# Altium PCB stm32g474_lof_of_via.pcbdoc
Units mil, origin at the board's own origin, x right, y up, seen from the top; angles counter-clockwise.
Board outline not stored, 2 copper layers (Top Layer, Bottom Layer); 8 components, 0 nets, 68 pads, 52 vias.
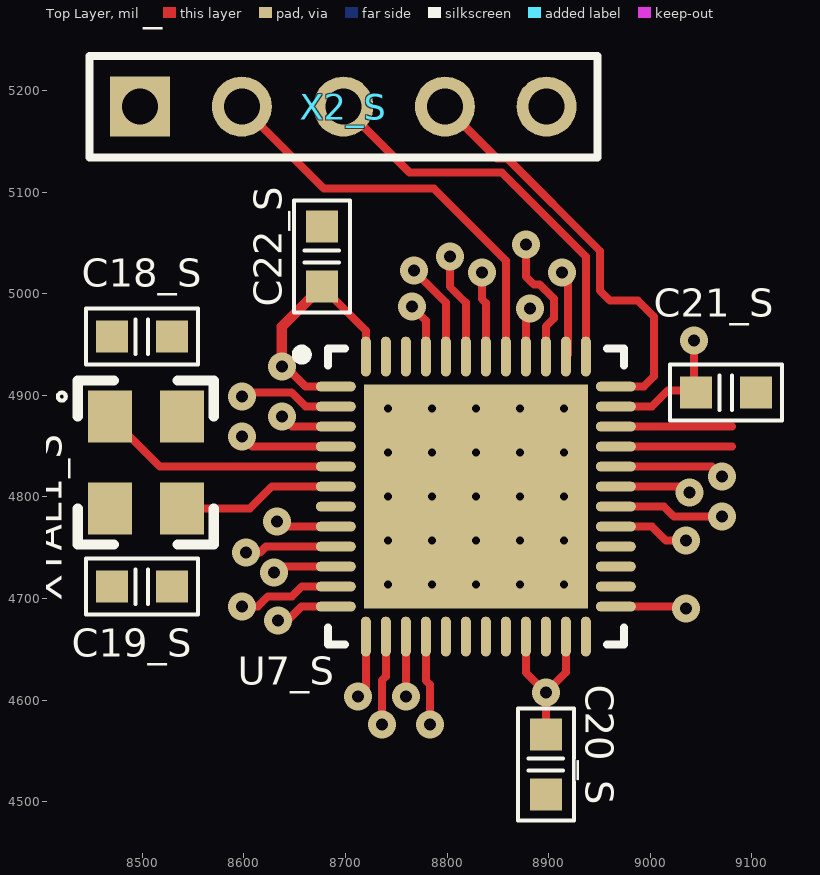
[diagram p0: Top Layer view]
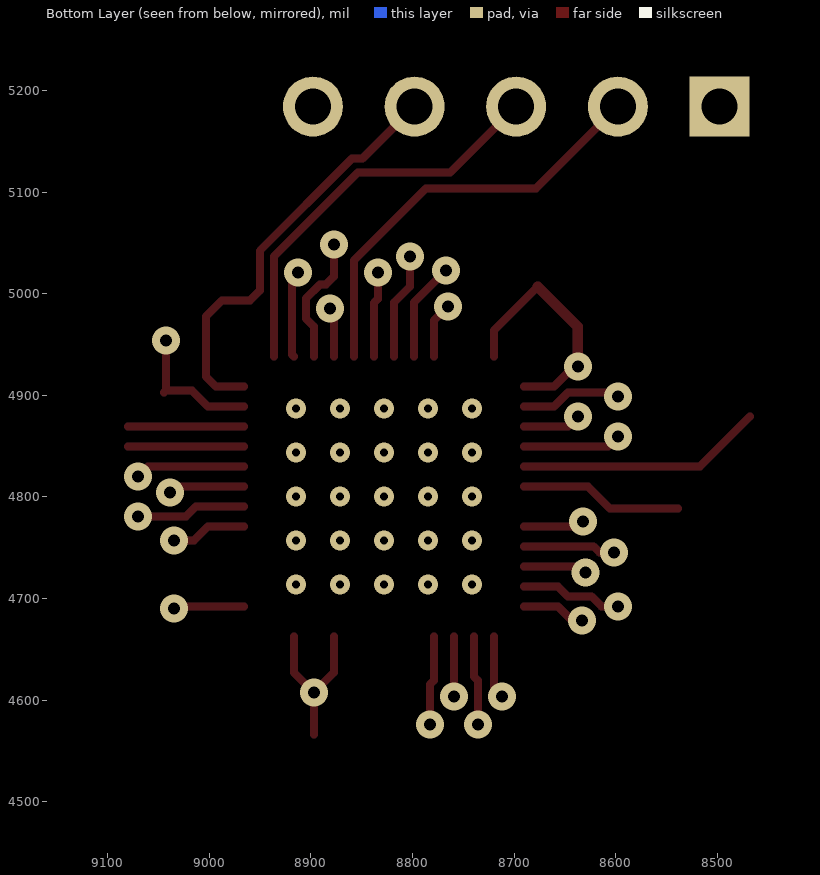
[diagram p1: Bottom Layer view, seen from below]

## Layer stack, top to bottom
Top Solder: solder mask 0.4, Solder Resist, Dk 3.5
Top Layer: signal copper 1.4
Dielectric 1: dielectric 12.6, FR-4, Dk 4.8
Bottom Layer: signal copper 1.4
Bottom Solder: solder mask 0.4, Solder Resist, Dk 3.5

## Components (designator, comment, footprint, x,y, rotation, side; value= is the part's Value field where it differs from the comment)
C18_S "12pF 16V" C_0603 8499.57,4957.76 r0 top (schematic designator C18)
C19_S "12pF 16V" C_0603 8499.57,4711.69 r180 top (schematic designator C19)
C20_S "100nF 16V" C_0603 8897.2,4536.5 r90 top (schematic designator C20)
C21_S "100nF 16V" C_0603 9074.37,4902.64 r180 top (schematic designator C21)
C22_S "100nF 16V" C_0603 8676.73,5036.5 r270 top (schematic designator C22)
U7_S "STM32G474CEU6" STM-UFQFPN48_M 8828.31,4800.28 r0 top (schematic designator U7)
X2_S "PLS-5" PLS-5-3D 8497.99,5184.13 r0 top (schematic designator X2)
XTAL1_S "KX-7 24 MHz" "KX - 7" 8538.94,4879.02 r270 top (schematic designator XTAL1)

## Footprints (in the part's own frame and the unit in brackets; to place one, negate y for a bottom-side part, rotate by r counter-clockwise, add the part's x,y. Pads: shape width x height; smd on the part's side, far side on the other; paste and mask are expansions set on the pad)
C_0603 [mm] "Chip Capacitor; Body 1.6 x 0.8 mm (LxW typ)"
  rect 0.8x0.8 smd: 1(-0.75,0) 2(0.75,0)
  silkscreen extent -1.4,-0.7 1.4,0.7, body extent -0.8,-0.4 0.8,0.4, height 0.3
"KX - 7" [mm] "Quartz"
  rect 1.3x1.1 smd: 1(0,-1.8) 2(2.3,-1.8) 3(2.3,0) 4(0,0)
  silkscreen extent -0.9,-3.1 3.2,0.8, body extent -0.46,-2.15 2.76,0.35, height 0.81
PLS-5-3D [mm] "Connector; Header; 5 Position"
  rect 1.5x1.5 hole 0.9: 1(0,0)
  round 1.5 hole 0.9: 2(2.54,0) 3(5.08,0) 4(7.62,0) 5(10.16,0)
  silkscreen extent -1.27,-1.27 11.43,1.27, body extent -1.27,-1.27 11.43,1.27, height 8.44
STM-UFQFPN48_M [mm] "QFN, 48-Leads, Body 7.1x7.1mm, Pitch 0.5mm, Thermal Pad 5.6x5.6mm, IPC Low Density"
  oval 1x0.25 smd mask+0.07: 1(-3.5,2.75) 2(-3.5,2.25) 3(-3.5,1.75) 4(-3.5,1.25) 5(-3.5,0.75) 6(-3.5,0.25) 7(-3.5,-0.25) 8(-3.5,-0.75) 9(-3.5,-1.25) 10(-3.5,-1.75) 11(-3.5,-2.25) 12(-3.5,-2.75) 25(3.5,-2.75) 26(3.5,-2.25) 27(3.5,-1.75) 28(3.5,-1.25) 29(3.5,-0.75) 30(3.5,-0.25) 31(3.5,0.25) 32(3.5,0.75) 33(3.5,1.25) 34(3.5,1.75) 35(3.5,2.25) 36(3.5,2.75)
  oval 0.25x1 smd mask+0.07: 13(-2.75,-3.5) 14(-2.25,-3.5) 15(-1.75,-3.5) 16(-1.25,-3.5) 17(-0.75,-3.5) 18(-0.25,-3.5) 19(0.25,-3.5) 20(0.75,-3.5) 21(1.25,-3.5) 22(1.75,-3.5) 23(2.25,-3.5) 24(2.75,-3.5) 37(2.75,3.5) 38(2.25,3.5) 39(1.75,3.5) 40(1.25,3.5) 41(0.75,3.5) 42(0.25,3.5) 43(-0.25,3.5) 44(-0.75,3.5) 45(-1.25,3.5) 46(-1.75,3.5) 47(-2.25,3.5) 48(-2.75,3.5)
  rect 5.6x5.6 smd mask+0.07: 49(0,0)
  silkscreen extent -4.47,-3.7 3.7,3.7, body extent -3.51,-3.52 3.51,3.5, height 0.78

## Part data
C18_S C19_S C20_S C21_S C22_S: library part C0603, "Capacitor"
U7_S: "MCU"
X2_S: library part PLS2-5, "Header, 5-Pin", LatestRevisionDate=17-Jul-2002, LatestRevisionNote="Re-released for DXP Platform.", Publisher="Altium Limited"
XTAL1_S: library part KX-7, "Quartz"

## Via types
v1: diameter 27.56, hole 11.81, Top Layer to Bottom Layer, tented both sides, 27 vias
v2: diameter 19.68, hole 7.87, Top Layer to Bottom Layer, 25 vias

## Nets (pads, with @x,y where several pads share a name; then routed paths per layer and width w, separated by ;. In a path a pad name is that pad's centre, name@x,y a point inside that pad or via, vN(x,y) a via of type N, cw(c..) or ccw(c..) an arc to the next point about the centre after c; other vN are vias at no path point)
pads on no net: C18_S.1 C18_S.2 C19_S.1 C19_S.2 C20_S.1 C20_S.2 C21_S.1 C21_S.2 C22_S.1 C22_S.2 U7_S.1 U7_S.2 U7_S.3 U7_S.4 U7_S.5 U7_S.6 U7_S.7 U7_S.8 U7_S.9 U7_S.10 U7_S.11 U7_S.12 U7_S.13 U7_S.14 U7_S.15 U7_S.16 U7_S.17 U7_S.18 U7_S.19 U7_S.20 U7_S.21 U7_S.22 U7_S.23 U7_S.24 U7_S.25 U7_S.26 U7_S.27 U7_S.28 U7_S.29 U7_S.30 U7_S.31 U7_S.32 U7_S.33 U7_S.34 U7_S.35 U7_S.36 U7_S.37 U7_S.38 U7_S.39 U7_S.40 U7_S.41 U7_S.42 U7_S.43 U7_S.44 U7_S.45 U7_S.46 U7_S.47 U7_S.48 U7_S.49 X2_S.1 X2_S.2 X2_S.3 X2_S.4 X2_S.5 XTAL1_S.1 XTAL1_S.2 XTAL1_S.3 XTAL1_S.4
copper on no net: | length 4395.7
  Top Layer w7.87: 8468.07,4879.02 8517.28,4829.8 8690.51,4829.8 ; 8538.94,4788.46 8605.87,4788.46 8627.52,4810.12 8690.51,4810.12 ; v1(8597.99,4692.01) 8613.79,4692.01 8623.63,4701.85 8647.2,4701.85 8657.05,4711.69 8690.51,4711.69 ; v1(8597.99,4859.33) 8607.83,4849.49 8690.51,4849.49 ; v1(8597.99,4898.7) 8601.93,4902.64 8647.15,4902.64 8660.93,4888.86 8690.51,4888.86 ; 8597.99,5184.13 8678.7,5103.42 8786.97,5103.42 8857.83,5032.56 8857.83,4938.07 ; v1@8607.83,4751.06 v1(8601.93,4745.16) 8615.76,4745.16 8621.67,4751.06 8690.51,4751.06 ; v1(8629.57,4725.47) 8629.57,4723.59 8627.52,4721.53 8637.36,4731.38 8690.51,4731.38 ; v1(8632.44,4775.67) 8637.36,4770.75 8690.51,4770.75 ; v1(8633.42,4678.23) 8643.07,4678.23 8656.85,4692.01 8690.51,4692.01 ; v1(8637.36,4879.02) 8647.2,4869.17 8690.51,4869.17 ; v1(8637.36,4928.23) 8641.04,4928.23 8660.73,4908.54 8690.51,4908.54 ; 8676.73,5006.97 8720.04,4963.66 8720.04,4938.07 ; 8697.99,5184.13 8762.95,5119.17 8853.9,5119.17 8936.57,5036.5 8936.57,4938.07 ; v1(8712.16,4603.43) 8720.04,4611.31 8720.04,4662.48 ; v1(8735.79,4575.87) 8735.79,4619.17 8739.72,4623.11 8739.72,4662.48 ; v1(8759.41,4603.42) 8759.41,4662.48 ; v1(8765.31,4987.28) 8779.09,4973.5 8779.09,4938.07 ; v1(8767.28,5022.78) 8798.78,4991.28 8798.78,4938.07 ; 8779.09,4662.48 8779.09,4619.17 8783.03,4615.24 v1(8783.03,4575.87) ; 8797.99,5184.13 8849.17,5132.95 8859.6,5132.95 8950.35,5042.2 8950.35,5003.03 8960.2,4993.19 8987.76,4993.19 9003.5,4977.44 9003.5,4918.39 8993.66,4908.54 8966.1,4908.54 ; v1(8802.71,5036.5) 8802.71,5006.84 8818.46,4991.08 8818.46,4938.07 ; v1(8834.21,5020.75) 8834.21,4994.82 8838.15,4990.89 8838.15,4938.07 ; 8877.52,4662.48 8877.52,4627.05 v1(8897.2,4607.36) ; 8877.52,4938.07 8877.52,4981.38 v1(8881.46,4985.31) ; v1(8877.52,5048.31) 8877.52,5016.81 8885.39,5008.94 8891.24,5008.94 8905.08,4995.1 8905.08,4975.53 8897.2,4967.66 8897.2,4938.07 ; 8897.2,4566.02 v1(8897.2,4607.36) ; v1(8912.95,5020.75) 8918.86,5014.84 8918.86,4940.04 8916.89,4938.07 ; 8916.89,4662.48 8916.89,4627.05 v1(8897.2,4607.36) ; 8966.1,4692.01 9033.03,4692.01 v1(9035,4690.04) ; 8966.1,4770.75 9001.53,4770.75 9015.31,4756.97 v1(9035,4756.97) ; 8966.1,4790.43 9013.35,4790.43 9023.19,4780.59 v1(9070.43,4780.59) ; 8966.1,4810.12 9032.95,4810.12 v1(9038.85,4804.21) ; 8966.1,4829.8 9060.59,4829.8 v1(9070.43,4819.96) ; 8966.1,4849.49 9080.27,4849.49 ; 8966.1,4869.17 9080.28,4869.17 ; 8966.1,4888.86 9001.53,4888.86 9017.28,4904.61 9042.87,4904.61 ; v1(9042.87,4953.82) 9042.87,4904.61 ; 9044.84,4902.64 9042.87,4904.61
  Top Layer w10: v1(8637.36,4928.23) 8637.36,4967.59 8676.73,5006.97
  other v2: 8741.69,4713.66 8785,4713.66 8828.31,4713.66 8871.61,4713.66 8914.92,4713.66 8741.69,4756.97 8785,4756.97 8828.31,4756.97 8871.61,4756.97 8914.92,4756.97 8741.69,4800.28 8785,4800.28 8828.31,4800.28 8871.61,4800.28 8914.92,4800.28 8741.69,4843.58 8785,4843.58 8828.31,4843.58 8871.61,4843.58 8914.92,4843.58 8741.69,4886.89 8785,4886.89 8828.31,4886.89 8871.61,4886.89 8914.92,4886.89